# Altium PCB optronik.PcbDoc (part 2 of 2)
Units mm, origin at the board's own origin, x right, y up, seen from the top; angles counter-clockwise.
Board outline 329.68 x 214.42 mm, 2 copper layers (Top Layer, Bottom Layer); 87 components, 162 nets, 420 pads, 75 vias.
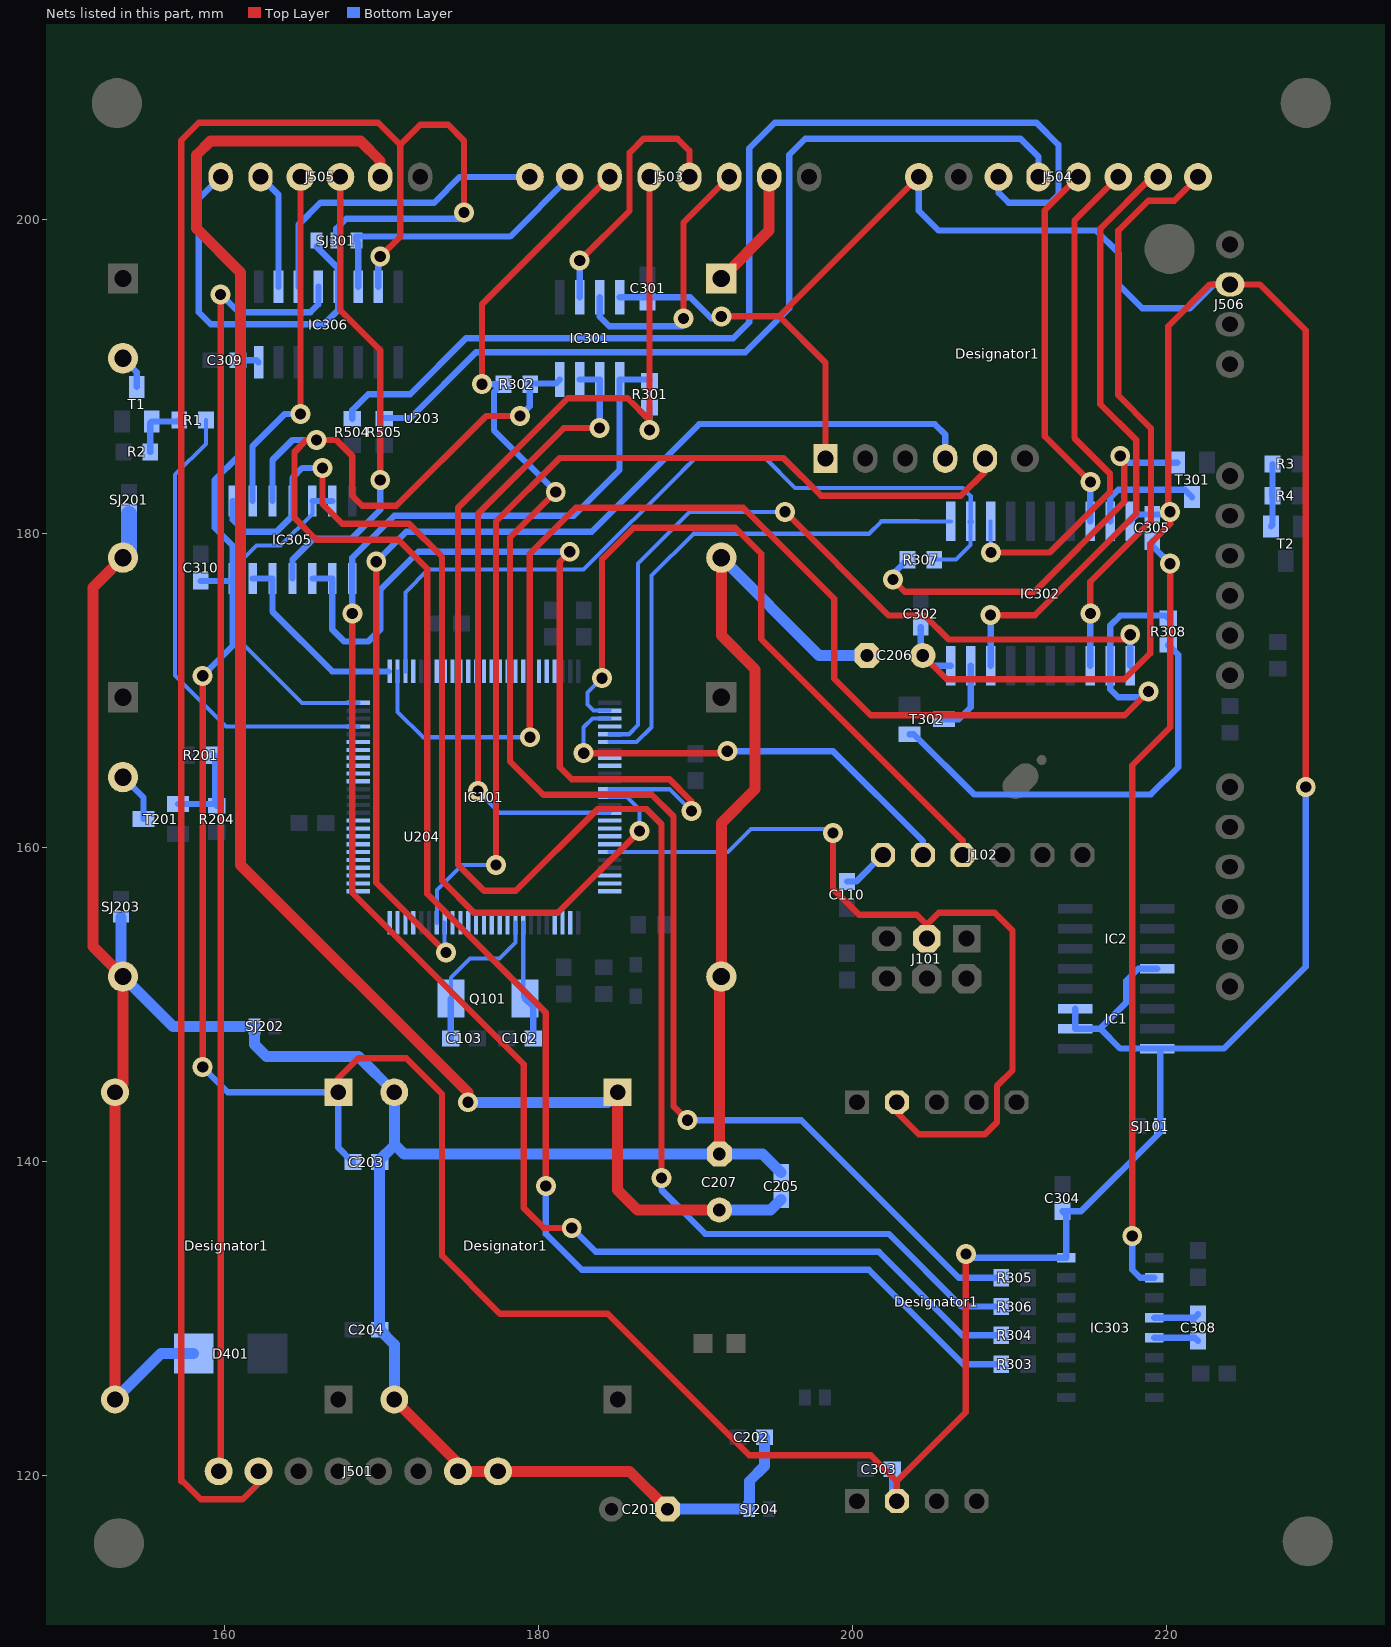
[diagram p2: the nets of this part, all layers, seen from the top]

## Via types
v1: diameter 1.27, hole 0.711, Top Layer to Bottom Layer, 74 vias
v2: diameter 1.5, hole 0.9, Top Layer to Bottom Layer, 1 vias

## Nets (pads, with @x,y where several pads share a name; then routed paths per layer and width w, separated by ;. In a path a pad name is that pad's centre, name@x,y a point inside that pad or via, vN(x,y) a via of type N, cw(c..) or ccw(c..) an arc to the next point about the centre after c; other vN are vias at no path point) (continued)
N$14: C308.1 IC303.5 | length 2.9
  Bottom Layer w0.4: IC303.5@219.208,128.778 221.781,128.778 C308.1@221.996,128.563
N$15: IC101.16
N$16: C308.2 IC303.4 | length 2.9
  Bottom Layer w0.4: IC303.4@219.208,130.048 221.781,130.048 C308.2@221.996,130.263
N$17: IC101.17
N$18: IC101.18
N$19: IC101.27
N$20: IC101.65
N$21: IC101.66
N$22: IC101.67
N$23: C305.1 IC303.2 | length 49.5
  Top Layer w0.4: v1(217.805,135.255) 217.805,165.227 220.218,167.64 v1(220.218,178.054)
  Bottom Layer w0.4: v1(217.805,135.255) 217.805,133.096 218.313,132.588 IC303.2@219.208,132.588 ; C305.1@219.075,179.49 219.075,179.197 v1(220.218,178.054)
N$24: IC101.68
N$25: IC101.69
N$26: IC101.79
N$27: IC101.89
N$28: IC101.88
N$29: IC101.87
N$30: IC101.86
N$31: IC101.85
N$32: IC101.84
N$33: IC101.83
N$34: IC101.82
N$35: IC101.35
N$36: IC101.36
N$37: IC101.37
N$38: IC101.38
N$39: IC101.39
N$40: IC101.40
N$41: IC101.41
N$42: IC101.42
N$43: 
N$44: 
N$45: 
N$46: 
N$47: 
N$48: 
N$49: IC101.60
N$50: IC101.59
N$51: IC101.58
N$52: IC101.57
N$53: C110.1 J102.6 | length 3
  Bottom Layer w0.4: C110.1@199.644,157.822 200.24,157.822 J102.6@201.93,159.512
N$54: IC101.56
N$55: IC101.55
N$56: IC101.54
N$57: IC101.53
N$58: IC101.50
N$59: IC101.49
N$60: IC101.48
N$61: IC101.47
N$62: IC101.24
N$63: IC101.25
N$64: IC101.9
N$65: IC101.8
N$66: IC101.4
N$67: IC101.90
N$68: IC101.91
N$69: IC101.92
N$70: IC101.93
N$71: IC101.94
N$72: IC101.95
N$73: IC101.96
N$74: IC101.97
N$75: 
N$76: IC101.29
N$77: IC101.28
N$78: IC101.70
N$79: IC101.52
N$80: IC101.51
N$81: R3.2 R4.1 T2.1 | length 4.4
  Bottom Layer w0.26: R4.1@226.634,182.372 R4.1@226.634,182.78
  Bottom Layer w0.4: T2.1@226.634,180.424 226.734,180.524 R3.2@226.734,184.404
N$82: R1.2 R2.2 T1.1 | length 3.8
  Bottom Layer w0.4: R2.2@155.282,185.166 155.282,187.014 T1.1@155.382,187.114 157.054,187.114 R1.2@157.138,187.198
N$83: T1.3 U203.5 | length 2.2
  Bottom Layer w0.4: U203.5@153.543,191.135 154.432,190.246 T1.3@154.432,189.314
N$84: IC101.19
N$85: 
N$86: 
N$87: 
N$88: IC101.23
N$89: R307.1 T301.1 | length 25.9
  Top Layer w0.4: v1(202.565,177.038) 203.327,176.276 211.582,176.276 217.297,181.991 217.297,184.658 v1(217.043,184.912)
  Bottom Layer w0.4: v1(202.565,177.038) 202.565,177.38 R307.1@203.493,178.308 ; v1(217.043,184.912) 217.467,184.488 T301.1@220.665,184.488
N$90: IC302.9 T301.3 | length 7.1
  Bottom Layer w0.4: IC302.9@216.408,180.749 216.408,182.245 216.916,182.753 221.15,182.753 T301.3@221.615,182.288
N$91: IC302.19 T302.3 | length 4.6
  Bottom Layer w0.4: T302.3@205.824,168.148 206.756,168.148 207.518,168.91 IC302.19@207.518,171.549
N$92: R308.2 T302.1 | length 27.5
  Bottom Layer w0.4: T302.1@203.624,167.198 203.896,167.198 207.73,163.364 218.99,163.364 220.726,165.1 220.726,172.251 R308.2@220.091,172.886 R308.2@220.091,172.847
N$97: R201.2 R204.2 T201.1 | length 5.7
  Bottom Layer w0.26: R204.2@159.512,162.648 R204.2@159.512,162.748
  Bottom Layer w0.4: T201.1@157.056,162.748 R204.2@159.412,162.748 ; R201.2@159.346,165.862 159.412,165.796 R204.2@159.412,162.748 ; R204.2@159.512,162.648 R204.2@159.412,162.748
N$100: T201.3 U204.5 | length 3.2
  Bottom Layer w0.4: U204.5@153.543,164.465 154.856,163.152 T201.3@154.856,161.798
PE0: IC101.2 J102.4 | length 47.3
  Top Layer w0.4: v1(184.048,170.764) 184.048,178.333 186.055,180.34 192.532,180.34 194.183,178.689 194.183,173.253 207.01,160.426 J102.4@207.01,159.512
  Bottom Layer w0.26: v1(184.048,170.764) 183.134,169.85 183.134,169.076 183.515,168.695 IC101.2@184.53,168.695
PE1: IC101.3 J102.5 | length 28.4
  Top Layer w0.4: v1(182.88,165.989) 191.897,165.989 v1(192.024,166.116)
  Bottom Layer w0.26: v1(182.88,165.989) 182.88,167.64 183.435,168.195 IC101.3@184.53,168.195
  Bottom Layer w0.4: v1(192.024,166.116) 198.755,166.116 204.47,160.401 J102.5@204.47,159.512
RXD2: IC101.12 IC305.9 IC305.10 | length 53.5
  Top Layer w0.4: v1(181.991,178.816) 181.356,178.181 181.356,165.1 182.118,164.338 188.341,164.338 189.738,162.941 v1(189.738,162.306)
  Bottom Layer w0.26: IC101.12@184.53,163.695 188.349,163.695 v1(189.738,162.306)
  Bottom Layer w0.4: IC305.10@165.608,177.114 IC305.9@166.878,177.114 166.878,173.863 167.64,173.101 169.164,173.101 169.926,173.863 169.926,176.403 172.339,178.816 v1(181.991,178.816)
SCK: Designator1.6@202.819,143.764 IC101.20 J101.3 | length 53.1
  Top Layer w0.4: v1(198.755,160.909) 198.755,157.353 200.406,155.702 204.089,155.702 204.724,155.067 ; Designator1.6@202.819,143.764 202.819,143.129 204.216,141.732 208.432,141.732 209.194,142.494 209.194,144.805 210.185,145.796 210.185,154.686 209.042,155.829 205.486,155.829 204.724,155.067 ; J101.3@204.724,154.178 204.724,155.067
  Bottom Layer w0.26: IC101.20@184.53,159.695 192.068,159.695 193.536,161.163 198.653,161.163 v1(198.755,160.909)
SCL: Designator1.4@205.894,184.758 IC101.43 | length 70.6
  Top Layer w0.4: v1@169.672,178.435 169.672,157.734 v1(174.117,153.289)
  Bottom Layer w0.26: IC101.43@174.03,155.195 174.03,153.376 v1(174.117,153.289)
  Bottom Layer w0.4: v1(169.672,178.181) 171.577,180.086 183.388,180.086 190.246,186.944 205.232,186.944 205.894,186.282 Designator1.4@205.894,184.758
SDA: Designator1.5@208.434,184.758 IC101.44 | length 63.7
  Top Layer w0.4: v1(177.292,158.877) 177.292,180.721 181.356,184.785 195.58,184.785 197.993,182.372 206.883,182.372 208.434,183.923 Designator1.5@208.434,184.758
  Bottom Layer w0.26: IC101.44@173.53,155.195 173.53,157.274 175.133,158.877 v1(177.292,158.877)
SONY_COMM_ENABLE: IC101.76 IC305.12 IC305.13 | length 12.4
  Bottom Layer w0.26: IC101.76@170.435,171.195 IC101.76@170.53,171.195
  Bottom Layer w0.4: IC305.13@161.798,177.114 IC305.12@163.068,177.114 163.068,175.006 166.879,171.195 IC101.76@170.435,171.195
SONY_RXD: IC305.2 J505.3 | length 22.5
  Top Layer w0.4: v1(164.846,187.579) J505.3@164.846,202.681
  Bottom Layer w0.4: IC305.2@161.798,182.042 161.798,185.547 163.83,187.579 v1(164.846,187.579)
SONY_TXD: IC305.11 J505.4 | length 30.3
  Top Layer w0.4: J505.4@167.386,202.681 167.386,194.183 169.926,191.643 v1(169.926,183.388)
  Bottom Layer w0.4: IC305.11@164.338,177.114 164.338,178.308 165.689,179.659 168.102,179.659 169.926,181.483 v1(169.926,183.388)
SONY_VDD: C205.1 C207.+ Designator1.3@185.039,144.401 J505.5 | length 108.3
  Top Layer w0.7: J505.5@169.926,202.681 169.926,203.708 168.656,204.978 159.131,204.978 158.242,204.089 158.242,199.39 161.036,196.596 161.036,158.877 175.514,144.399 v1(175.514,143.764) ; Designator1.3@185.039,144.401 185.039,138.176 186.309,136.906 C207.+@191.516,136.906
  Bottom Layer w0.4: Designator1.3@184.402,143.764 Designator1.3@185.039,144.401
  Bottom Layer w0.7: v1(175.514,143.764) Designator1.3@184.402,143.764 ; C207.+@191.516,136.906 194.779,136.906 C205.1@195.453,137.58
SONY_VIDEO+: IC306.2 J505.2 | length 7.5
  Bottom Layer w0.4: J505.2@162.306,202.681 163.449,201.538 IC306.2@163.449,195.682
SONY_VIDEO-: IC306.5 J505.1 SJ301.1 | length 23.4
  Bottom Layer w0.4: J505.1@159.766,202.681 158.369,201.284 158.369,194.056 159.131,193.294 166.345,193.294 167.259,194.208 167.259,196.85 SJ301.1@165.862,198.247
THERMAL_485A: IC301.6 J503.5 | length 16.7
  Top Layer w0.4: v1(182.626,197.358) 185.801,200.533 185.801,204.216 186.69,205.105 188.849,205.105 189.611,204.343 J503.5@189.611,202.681
  Bottom Layer w0.4: IC301.6@182.626,195.01 v1(182.626,197.358)
THERMAL_485B: IC301.7 J503.6 | length 17.4
  Top Layer w0.4: v1(189.23,193.675) 189.23,199.76 J503.6@192.151,202.681
  Bottom Layer w0.4: IC301.7@183.896,195.01 183.896,193.778 184.507,193.167 189.103,193.167 v1(189.23,193.675)
THERMAL_COMM_ENABLE: IC101.75 IC305.5 IC305.6 | length 21.8
  Bottom Layer w0.26: IC305.5@165.608,181.864 165.608,181.229 163.588,179.209 162.052,179.209 161.163,178.32 161.163,172.974 164.942,169.195 IC101.75@168.53,169.195
  Bottom Layer w0.4: IC305.5@165.608,182.042 IC305.6@166.878,182.042
THERMAL_COMM_SELECT: IC101.15 IC301.2 IC301.3 | length 41
  Top Layer w0.4: v1(176.149,163.576) 176.149,181.229 181.61,186.69 v1(183.896,186.69)
  Bottom Layer w0.26: v1(176.149,163.576) 177.53,162.195 IC101.15@184.53,162.195
  Bottom Layer w0.4: IC301.3@182.626,189.778 IC301.2@183.896,189.778 v1(183.896,186.69)
THERMAL_FB_FOCUS: J504.3 R504.1 | length 68.8
  Bottom Layer w0.26: R504.1@168.148,187.286 R504.1@168.148,187.452
  Bottom Layer w0.4: R504.1@168.148,187.286 168.148,187.833 169.164,188.849 171.831,188.849 175.387,192.405 192.405,192.405 193.421,193.421 193.421,204.495 195.047,206.121 211.709,206.121 213.106,204.724 213.106,201.549 212.598,201.041 209.931,201.041 209.296,201.676 J504.3@209.296,202.681
THERMAL_FB_ZOOM: J504.4 R505.1 | length 56.5
  Bottom Layer w0.26: R505.1@170.18,187.286 R505.1@170.219,187.325
  Bottom Layer w0.4: R505.1@170.219,187.325 171.831,187.325 176.022,191.516 193.167,191.516 195.961,194.31 195.961,204.089 196.977,205.105 210.693,205.105 211.836,203.962 J504.4@211.836,202.681
THERMAL_FOCUS+: IC302.13 J504.8 | length 36.9
  Top Layer w0.4: v1(215.138,174.879) 215.138,176.911 218.996,180.769 218.996,186.69 216.916,188.77 216.916,199.263 218.821,201.168 220.483,201.168 J504.8@221.996,202.681 J504.8@221.996,202.438
  Bottom Layer w0.4: IC302.13@215.138,171.549 v1(215.138,174.879)
THERMAL_FOCUS-: IC302.18 J504.7 | length 39.3
  Top Layer w0.4: v1(208.788,174.777) 211.607,174.777 218.059,181.229 218.059,185.928 215.773,188.214 215.773,199.39 219.064,202.681 J504.7@219.456,202.681
  Bottom Layer w0.4: IC302.18@208.788,171.549 v1(208.788,174.777)
THERMAL_FOCUS_DIR: IC101.77 IC302.12 R308.1 | length 83.9
  Top Layer w0.4: v1(179.451,167.005) 179.451,178.689 182.372,181.61 193.04,181.61 198.835,175.815 198.835,170.735 201.168,168.402 217.322,168.402 v1(218.846,169.926)
  Bottom Layer w0.26: IC101.77@171.03,171.195 171.03,168.619 172.644,167.005 v1(179.451,167.005)
  Bottom Layer w0.4: v1(218.846,169.926) 218.465,169.545 216.916,169.545 216.408,170.053 216.408,174.117 217.043,174.752 219.925,174.752 R308.1@220.091,174.586
THERMAL_FOCUS_PLS: IC101.5 IC302.11 | length 50.5
  Top Layer w0.4: v1(195.707,181.356) 202.311,174.752 204.597,174.752 206.121,173.228 217.373,173.228 v1(217.678,173.533)
  Bottom Layer w0.26: IC101.5@184.53,167.195 185.75,167.195 186.334,167.779 186.334,178.079 189.611,181.356 v1(195.707,181.356)
  Bottom Layer w0.4: IC302.11@217.678,171.549 v1(217.678,173.533)
THERMAL_PWR_ENABLE: IC101.72 R1.1 | length 30.1
  Bottom Layer w0.26: R1.1@158.838,187.198 158.838,185.686 156.87,183.718 156.87,170.942 160.117,167.695 IC101.72@168.53,167.695
THERMAL_RX: J503.3 R302.1 R305.1 | length 100.7
  Top Layer w0.4: v1(176.403,189.484) 176.403,194.564 184.52,202.681 J503.3@184.531,202.681 ; v1(181.102,182.626) 178.181,179.705 178.181,165.481 180.315,163.347 187.21,163.347 188.595,161.962 188.595,143.51 v1(189.484,142.621)
  Bottom Layer w0.4: v1(176.403,189.484) R302.1@177.771,189.484 ; R302.1@177.673,189.484 177.165,188.976 177.165,186.563 v1(181.102,182.626) ; v1(189.484,142.621) 196.723,142.621 206.756,132.588 R305.1@209.462,132.588
THERMAL_RXD: IC301.4 IC305.3 R302.2 R303.2 | length 122.4
  Top Layer w0.4: v1(178.816,187.452) 176.657,187.452 170.942,181.737 168.783,181.737 168.148,182.372 168.148,184.912 167.132,185.928 165.227,185.928 164.465,185.166 164.465,180.975 165.862,179.578 171.069,179.578 172.919,177.728 172.919,157.027 180.467,149.479 v1(180.467,138.43)
  Bottom Layer w0.26: R302.2@179.442,189.493 179.451,189.523 R302.2@179.471,189.523
  Bottom Layer w0.4: IC305.3@163.068,182.042 163.068,184.658 164.338,185.928 v1(165.862,185.928) ; v1(178.816,187.452) 179.442,188.078 R302.2@179.442,189.493 ; R302.2@179.451,189.523 181.101,189.523 IC301.4@181.356,189.778 ; v1(180.467,138.43) 180.467,135.382 182.753,133.096 201.041,133.096 207.045,127.092 R303.2@209.462,127.092
THERMAL_TX: J503.4 R301.2 R306.1 | length 120.1
  Top Layer w0.4: v1(187.071,186.563) J503.4@187.071,202.681 ; 187.071,187.198 185.674,188.595 181.864,188.595 174.879,181.61 174.879,158.877 176.53,157.226 178.562,157.226 183.769,162.433 186.872,162.433 187.833,161.472 v1(187.833,138.938)
  Bottom Layer w0.4: v1(187.071,186.563) R301.2@187.071,187.999 ; v1(187.833,138.938) 187.833,138.176 190.627,135.382 202.311,135.382 206.937,130.756 R306.1@209.462,130.756
THERMAL_TXD: IC301.1 IC305.8 R301.1 R304.2 | length 106.8
  Top Layer w0.4: v1(168.148,174.879) 168.148,157.099 179.07,146.177 179.07,137.033 180.34,135.763 v1(182.118,135.763)
  Bottom Layer w0.26: IC305.8@168.148,177.038 IC305.8@168.148,177.114
  Bottom Layer w0.4: v1(168.148,174.879) 168.148,178.435 170.815,181.102 182.245,181.102 185.166,184.023 IC301.1@185.166,189.778 186.992,189.778 R301.1@187.071,189.699 ; v1(182.118,135.763) 183.642,134.239 201.676,134.239 206.991,128.924 R304.2@209.462,128.924
THERMAL_VDD: J503.7 U203.2 | length 7.7
  Top Layer w0.7: U203.2@191.643,196.215 194.691,199.263 J503.7@194.691,202.681
THERMAL_VIDEO+: IC306.3 J503.1 | length 20
  Bottom Layer w0.4: IC306.3@164.719,195.682 164.719,199.644 166.116,201.041 173.355,201.041 174.995,202.681 J503.1@179.451,202.681
THERMAL_VIDEO-: IC306.6 J503.2 SJ301.3 | length 18.4
  Bottom Layer w0.4: IC306.6@168.529,195.682 168.529,198.501 SJ301.3@168.402,198.628 168.402,198.882 178.192,198.882 J503.2@181.991,202.681
THERMAL_ZOOM+: IC302.3 J504.6 | length 33.3
  Top Layer w0.4: v1(208.813,178.765) 212.547,178.765 216.383,182.601 216.383,183.794 214.122,186.055 214.122,199.887 J504.6@216.916,202.681
  Bottom Layer w0.26: IC302.3@208.788,180.749 208.788,178.791 v1(208.813,178.765)
THERMAL_ZOOM-: IC302.8 J504.5 | length 24
  Top Layer w0.4: J504.5@214.376,202.681 212.242,200.547 212.242,186.157 v1(215.138,183.261)
  Bottom Layer w0.4: IC302.8@215.138,180.749 v1(215.138,183.261)
THERMAL_ZOOM_DIR: IC101.78 IC302.2 R307.2 | length 51.4
  Bottom Layer w0.26: IC101.78@171.53,171.195 171.53,176.229 172.974,177.673 182.88,177.673 189.191,183.984 ; R307.2@205.193,178.308 206.59,178.308 207.518,179.236 IC302.2@207.518,180.749
  Bottom Layer w0.27: 189.191,183.984 189.992,184.785 194.437,184.785 196.342,182.88 207.01,182.88 207.518,182.372 IC302.2@207.518,180.749
  Bottom Layer w0.4: IC302.2@207.504,180.735 IC302.2@207.518,180.721
THERMAL_ZOOM_PLS: IC101.6 IC302.1 | length 33.9
  Bottom Layer w0.26: IC101.6@184.53,166.695 186.253,166.695 187.198,167.64 187.198,177.292 189.865,179.959 201.041,179.959 ; 203.482,180.749 IC302.1@206.248,180.749
  Bottom Layer w0.27: 201.041,179.959 201.831,180.749 204.216,180.749
TXD2: IC101.13 IC305.1 IC305.4 | length 61.4
  Top Layer w0.4: v1(166.243,184.15) 166.243,181.864 167.513,180.594 171.755,180.594 173.863,178.486 173.863,157.861 175.895,155.829 181.229,155.829 v1(186.436,161.036)
  Bottom Layer w0.26: IC101.13@184.53,163.195 185.649,163.195 186.436,162.408 v1(186.436,161.036)
  Bottom Layer w0.4: IC305.1@160.528,182.042 160.528,180.848 161.29,180.086 163.322,180.086 164.338,181.102 164.338,183.515 164.973,184.15 v1(166.243,184.15)
V-: C201.- C202.1 C203.2 C204.1 C205.2 C206.- C207.- D401.A Designator1.2@153.039,124.841 Designator1.2@170.819,124.841 Designator1.4@153.039,144.401 Designator1.4@170.819,144.401 J501.1 J501.2 SJ201.2 SJ202.2 SJ203.2 SJ204.2 U203.3 U203.4 U204.3 U204.4 | length 218.2
  Top Layer w0.4: J501.1@177.419,120.269 J501.1@177.546,120.269
  Top Layer w0.7: Designator1.2@153.039,124.841 Designator1.4@153.039,144.401 153.543,144.905 U204.3@153.543,151.765 151.638,153.67 151.638,176.53 U203.3@153.543,178.435 ; Designator1.2@170.819,124.841 174.879,120.781 J501.2@174.879,120.269 185.801,120.269 C201.-@188.214,117.856 ; C207.-@191.516,140.462 191.516,151.638 U204.4@191.643,151.765 191.643,161.544 193.802,163.703 193.802,171.323 191.643,173.482 U203.4@191.643,178.435
  Bottom Layer w0.26: SJ203.2@153.416,155.575 SJ203.2@153.543,155.575 ; Designator1.4@170.752,144.335 170.819,144.268 Designator1.4@170.819,144.401 Designator1.4@170.752,144.335
  Bottom Layer w0.4: C203.2@169.887,140.081 C203.2@169.887,139.954 C203.2@169.95,140.017 ; Designator1.2@170.819,124.841 Designator1.2@170.819,124.968
  Bottom Layer w0.7: Designator1.2@153.039,124.841 155.96,127.762 D401.A@158.052,127.762 ; SJ203.2@153.416,155.575 153.416,151.892 156.718,148.59 SJ202.2@161.925,148.59 161.925,147.447 162.687,146.685 168.535,146.685 Designator1.4@170.819,144.401 170.819,141.013 C203.2@169.887,140.081 ; U203.3@153.543,178.435 U203.3@153.924,178.816 ; C203.2@169.887,139.954 C204.1@169.887,129.286 170.819,128.354 Designator1.2@170.819,124.968 ; 170.819,141.093 171.45,140.462 194.271,140.462 C205.2@195.453,139.28 ; C201.-@188.214,117.856 SJ204.2@193.421,117.856 193.421,119.634 194.398,120.611 C202.1@194.398,122.428 ; U203.4@191.643,178.435 197.866,172.212 C206.-@200.914,172.212
  Bottom Layer w1: U203.3@153.924,178.816 SJ201.2@153.924,181.229
VCC: C203.1 C206.+ C301.2 C302.1 C303.1 C304.1 C305.2 C309.2 C310.2 Designator1.1@198.274,184.758 Designator1.2@202.819,118.364 Designator1.3@167.259,144.401 IC1.2 IC1.3 IC1.8 IC2.8 IC301.8 IC302.10 IC302.20 IC303.16 IC305.14 IC306.16 J504.1 J506.2 SJ101.1 | length 343.7
  Top Layer w0.4: v1(158.623,145.999) v1(158.623,170.917) ; Designator1.3@167.259,144.401 167.259,145.288 168.529,146.558 171.577,146.558 173.863,144.272 173.863,133.985 177.546,130.302 184.404,130.302 193.421,121.285 201.168,121.285 202.819,119.634 ; v1(191.643,193.802) 195.326,193.802 198.274,190.854 Designator1.1@198.274,184.758 ; 195.331,193.797 J504.1@204.216,202.681 ; Designator1.2@202.819,118.364 202.819,119.634 ; C206.+@204.47,172.212 205.994,170.688 217.297,170.688 218.948,172.339 218.948,179.324 220.218,180.594 v1(220.218,181.356) 220.091,181.483 220.091,193.167 222.758,195.834 225.933,195.834 228.854,192.913 v1(228.854,163.83) ; v1(207.213,134.112) 207.213,124.028 202.819,119.634
  Bottom Layer w0.26: IC305.14@160.364,176.95 IC305.14@160.528,177.114 ; C309.2@160.87,191.008 C309.2@160.997,190.881 ; C301.2@187.071,194.603 C301.2@187.11,194.564 ; C304.1@213.36,136.818 C304.1@213.78,136.818 ; IC302.10@217.678,180.848 IC302.10@217.777,180.848 ; IC1.8@219.405,147.182 IC1.8@219.583,147.004
  Bottom Layer w0.4: C310.2@158.496,176.95 160.489,176.95 IC305.14@160.528,176.911 ; v1(158.623,145.999) 160.221,144.401 Designator1.3@167.259,144.401 167.259,140.882 C203.1@168.187,139.954 ; v1(158.623,170.917) 160.528,172.822 160.528,179.197 159.385,180.34 159.385,183.388 160.87,184.873 C309.2@160.87,191.008 162.052,191.008 IC306.16@162.179,190.881 ; IC301.8@185.166,195.01 189.673,195.01 191.008,193.675 v1(191.643,193.802) ; C303.1@202.526,120.396 202.526,118.657 Designator1.2@202.819,118.364 ; J504.1@204.216,202.681 204.216,200.533 205.486,199.263 215.519,199.263 216.916,197.866 216.916,195.834 218.44,194.31 221.488,194.31 223.012,195.834 J506.2@224.028,195.834 ; C206.+@204.343,172.886 204.597,172.632 C206.+@204.597,172.085 ; C302.1@204.343,174.029 204.343,172.339 205.133,171.549 IC302.20@206.248,171.549 ; v1(207.213,134.112) 207.467,133.858 IC303.16@213.608,133.858 213.608,136.57 C304.1@213.36,136.818 214.542,136.818 219.583,141.859 IC1.8@219.583,147.182 ; IC1.3@214.173,149.722 IC1.2@214.173,148.452 215.762,148.452 ; 215.773,148.463 217.424,150.114 217.424,151.5 218.186,152.262 IC2.8@219.405,152.262 ; 215.784,148.452 217.054,147.182 223.636,147.182 228.854,152.4 v1(228.854,163.83) ; IC302.10@217.678,180.749 218.119,181.19 220.052,181.19 v1(220.218,181.356)
VIDEO_OUT+: IC306.4 J501.8 | length 83.2
  Top Layer w0.26: v1(159.766,195.199) v1@159.893,195.072
  Top Layer w0.4: J501.8@159.639,120.269 159.766,120.396 v1(159.766,195.199)
  Bottom Layer w0.4: v1(159.766,195.199) 160.909,194.056 165.481,194.056 165.989,194.564 IC306.4@165.989,195.682
VIDEO_OUT-: IC306.7 J501.7 SJ301.2 | length 135.4
  Top Layer w0.4: 157.253,119.634 157.253,205.005 158.369,206.121 169.799,206.121 171.196,204.724 ; 157.353,119.634 158.496,118.491 161.163,118.491 162.179,119.507 J501.7@162.179,120.269 ; v1(169.926,197.612) 171.196,198.882 171.196,204.724 ; v1(175.26,200.406) 175.26,204.978 174.244,205.994 172.466,205.994 171.196,204.724
  Bottom Layer w0.4: SJ301.2@167.132,198.628 167.132,199.39 167.767,200.025 174.879,200.025 v1(175.26,200.406) ; IC306.7@169.799,195.682 169.799,197.485 v1(169.926,197.612)
XTAL1: C103.2 IC101.34 Q101.P$1 | length 10.2
  Bottom Layer w0.26: Q101.P$1@174.41,150.352 Q101.P$1@174.426,150.368 174.426,151.693 175.641,152.908 177.514,152.908 178.53,153.924 IC101.34@178.53,155.195
  Bottom Layer w0.4: C103.2@174.41,147.828 Q101.P$1@174.41,150.352
XTAL2: C102.2 IC101.33 Q101.P$2 | length 7.6
  Bottom Layer w0.26: IC101.33@179.03,155.195 179.03,150.48 Q101.P$2@179.142,150.368
  Bottom Layer w0.4: Q101.P$2@179.142,150.368 179.666,149.844 C102.2@179.666,147.828
pads on no net: Designator1. Designator1.2@200.814,184.758 Designator1.P$1 Designator1.P$2 IC1.1 IC2.4 IC306.9 IC306.10 IC306.11 IC306.12 IC306.13 IC306.14 J102.2 J502.4
copper on no net: | length 63.8
  Top Layer w0.008: 155.702,207.38 ccw(c153.162,207.38) 155.702,207.38 ; 155.829,115.686 ccw(c153.289,115.686) 155.829,115.686 ; 231.267,207.38 ccw(c228.727,207.38) 231.267,207.38 ; 231.521,115.813 ccw(c228.981,115.813) 231.521,115.813

## Polygon pours and split planes (outlines as drawn)
+24V on Top Layer "Top Layer-+24V" (solid, remove dead copper, pour order 10): 153.543,196.215 152.654,196.215 151.638,197.231 151.638,202.565 152.654,203.581 155.702,203.581 156.591,202.692 156.464,202.819 156.464,118.745 157.861,117.348 167.259,117.348 168.91,118.999 168.91,121.92 168.021,122.809 162.179,122.809 161.163,123.825 161.163,126.365 161.798,127 165.735,127 174.371,118.364 184.658,118.364 184.658,117.729 186.563,115.824 189.484,115.824 190.627,116.967 190.627,120.904 187.325,124.206 184.658,124.206 184.658,125.476 185.547,126.365 186.69,126.365 192.405,120.65 192.405,116.459 190.5,114.554 158.75,114.554 155.575,117.729 155.448,117.856 155.575,117.729 155.448,117.856 155.448,166.116 153.797,167.767 153.797,170.561 155.829,172.593 155.829,194.056 153.67,196.215
V- on Top Layer "Top Layer-V-" (solid, remove dead copper, pour order 8): 188.214,117.856 188.214,121.158 186.944,122.428 183.515,122.428 177.8,128.143 172.593,133.35 172.593,142.621 170.819,144.395 168.664,142.24 163.703,142.24 161.925,140.462 161.925,129.794 163.576,128.143 167.259,128.143 170.561,124.841 174.879,120.523 185.801,120.523 188.214,118.11
V- on Top Layer "Top Layer-V- 1" (solid, remove dead copper, pour order 6): 153.039,124.841 154.686,126.488 154.686,160.655 151.765,163.576 151.765,171.831 151.638,171.704 154.813,174.879 154.813,186.817 153.797,187.833 152.019,187.833 151.003,186.817 151.003,126.619 152.781,124.841
0V on Top Layer "Top Layer-0V" (solid, remove dead copper, pour order 4): 195.58,162.56 193.548,160.528 193.548,131.064 192.405,129.921 192.405,128.397 192.566,128.397 192.566,125.349 194.09,123.825 203.073,123.825 204.597,125.349 204.597,136.144 198.12,142.621 198.12,146.05 202.311,150.241 202.311,151.638 196.977,151.638 195.58,153.035
GND on Top Layer "Top Layer-GND" (hatched 90Degree grid 0 track 0.23, remove dead copper, pour order 2): 151.13,209.804 231.14,209.804 231.14,114.046 151.13,114.046
+24V on Bottom Layer "Bottom Layer-+24V" (solid, remove dead copper, pour order 24): 169.799,120.269 172.339,120.269 174.371,118.237 178.435,118.237 180.213,120.015 180.213,124.333 181.483,125.603 191.516,125.603 192.913,124.206 192.913,122.428 188.341,122.428 184.658,118.745 184.658,116.205 183.769,115.316 171.069,115.316 169.672,116.713 169.672,120.269
+24V on Bottom Layer "Bottom Layer-+24V 1" (solid, remove dead copper, pour order 22): 168.187,129.286 168.187,136.906 163.107,141.986 162.306,141.986 161.671,141.351 161.671,125.73 162.941,124.46 167.259,124.46 168.275,125.476 168.275,129.286
V- on Bottom Layer "Bottom Layer-V-" (solid, remove dead copper, pour order 20): 191.643,178.435 191.643,173.609 193.548,171.704 201.168,171.704 201.168,177.546 199.771,178.943 192.024,178.943 191.643,178.562
V- on Bottom Layer "Bottom Layer-V- 1" (solid, remove dead copper, pour order 18): 194.398,122.428 194.398,121.412 193.382,120.396 188.722,120.396 187.96,119.634 187.96,117.856 193.421,117.856 193.421,118.618 194.691,119.888 194.691,122.301 194.398,122.301
V- on Bottom Layer "Bottom Layer-V- 2" (solid, remove dead copper, pour order 16): 153.416,155.575 151.638,153.797 151.638,126.238 153.035,124.841 157.48,124.841 158.877,126.238 158.877,141.859 156.718,144.018 156.718,147.066 158.242,148.59 159.639,148.59 161.798,146.431 168.535,146.431 170.016,144.95 169.678,145.288 169.678,125.603 170.567,124.714 171.577,124.714 175.514,128.651 175.514,137.414 178.562,140.462 191.516,140.462 190.754,141.224 174.371,141.224 168.402,147.193 163.068,147.193 161.925,148.336 161.925,154.432 160.909,155.448 153.543,155.448
0V on Bottom Layer "Bottom Layer-0V" (solid, remove dead copper, pour order 14): 176.11,147.828 177.966,147.828 177.966,147.32 178.601,146.685 180.721,146.685 181.356,147.32 181.356,150.661 181.991,150.661 183.935,148.717 207.01,148.717 210.058,151.765 210.058,155.321 214.249,159.512 214.63,159.512 215.138,159.004 215.138,157.988 214.376,157.226 213.106,157.226 210.693,154.813 210.693,151.765 210.185,151.257 210.185,149.606 209.169,148.59 209.042,148.463 205.105,148.463 204.089,147.447 183.769,147.447 182.118,145.796 176.53,145.796 176.022,146.304 176.022,147.828
GND on Bottom Layer "Bottom Layer-GND" (hatched 90Degree grid 0 track 0.23, remove dead copper, pour order 12): 151.13,209.804 231.267,209.804 231.267,113.157 151.13,113.157

## Keep-outs
Keep-Out Layer:
  lines w0.3: 150.622,112.522 231.789,112.522 231.912,210.439 150.622,210.439 150.622,112.522

## Other copper
Top Layer:
  text "optronik_20171017" at 228.346,147.066 h1.75 r270
  text "- RESPATI -" at 225.171,143.637 h1.75 r270
Multi-Layer:
  circle w0.008: c153.162,207.38 r2.54
  circle w0.008: c153.289,115.686 r2.54
  circle w0.008: c228.981,115.813 r2.54
  circle w0.008: c228.727,207.38 r2.54

## Dimensions
150.622,112.522 to 231.789,112.522 on Mechanical 1
150.622,112.522 to 150.622,210.439 on Mechanical 1

## Text inside footprints (layer, text, board x,y; h text height)
Designator1: Top Overlay "X" at 221.134,189.203 h1.27 r90; Top Overlay "Y" at 218.594,193.648 h1.27 r180; Top Overlay "Z" at 214.784,196.188 h1.27 r90
Designator1: Top Overlay "IN -" at 156.083,127.127 h1.27 r90; Top Overlay "IN +" at 165.227,126.873 h1.27 r90; Top Overlay "OUT +" at 167.005,147.447 h1.27 r180; Top Overlay "OUT -" at 157.861,147.447 h1.27 r180
Designator1: Top Overlay "IN -" at 173.863,127.127 h1.27 r90; Top Overlay "IN +" at 183.007,126.873 h1.27 r90; Top Overlay "OUT +" at 184.785,147.447 h1.27 r180; Top Overlay "OUT -" at 175.641,147.447 h1.27 r180
IC305: Bottom Overlay "*" at 160.122,182.88 h1.27 r90; Bottom Overlay "*" at 160.122,182.88 h1.27 r90
IC306: Bottom Overlay "*" at 161.747,196.266 h1.27 r270; Bottom Overlay "*" at 161.747,196.266 h1.27 r270
J501: Top Overlay "1" at 177.649,119.069 h0.61 r180
J502: Top Overlay "1" at 225.227,183.872 h0.61 r270
J503: Top Overlay "1" at 179.221,203.881 h0.61
J504: Top Overlay "1" at 203.986,203.881 h0.61
J505: Top Overlay "1" at 159.536,203.881 h0.61
J506: Top Overlay "1" at 225.227,198.604 h0.61 r270
J507: Top Overlay "1" at 225.227,164.06 h0.61 r270